# EAGLE board MCDB (EAGLE 9.4.2)
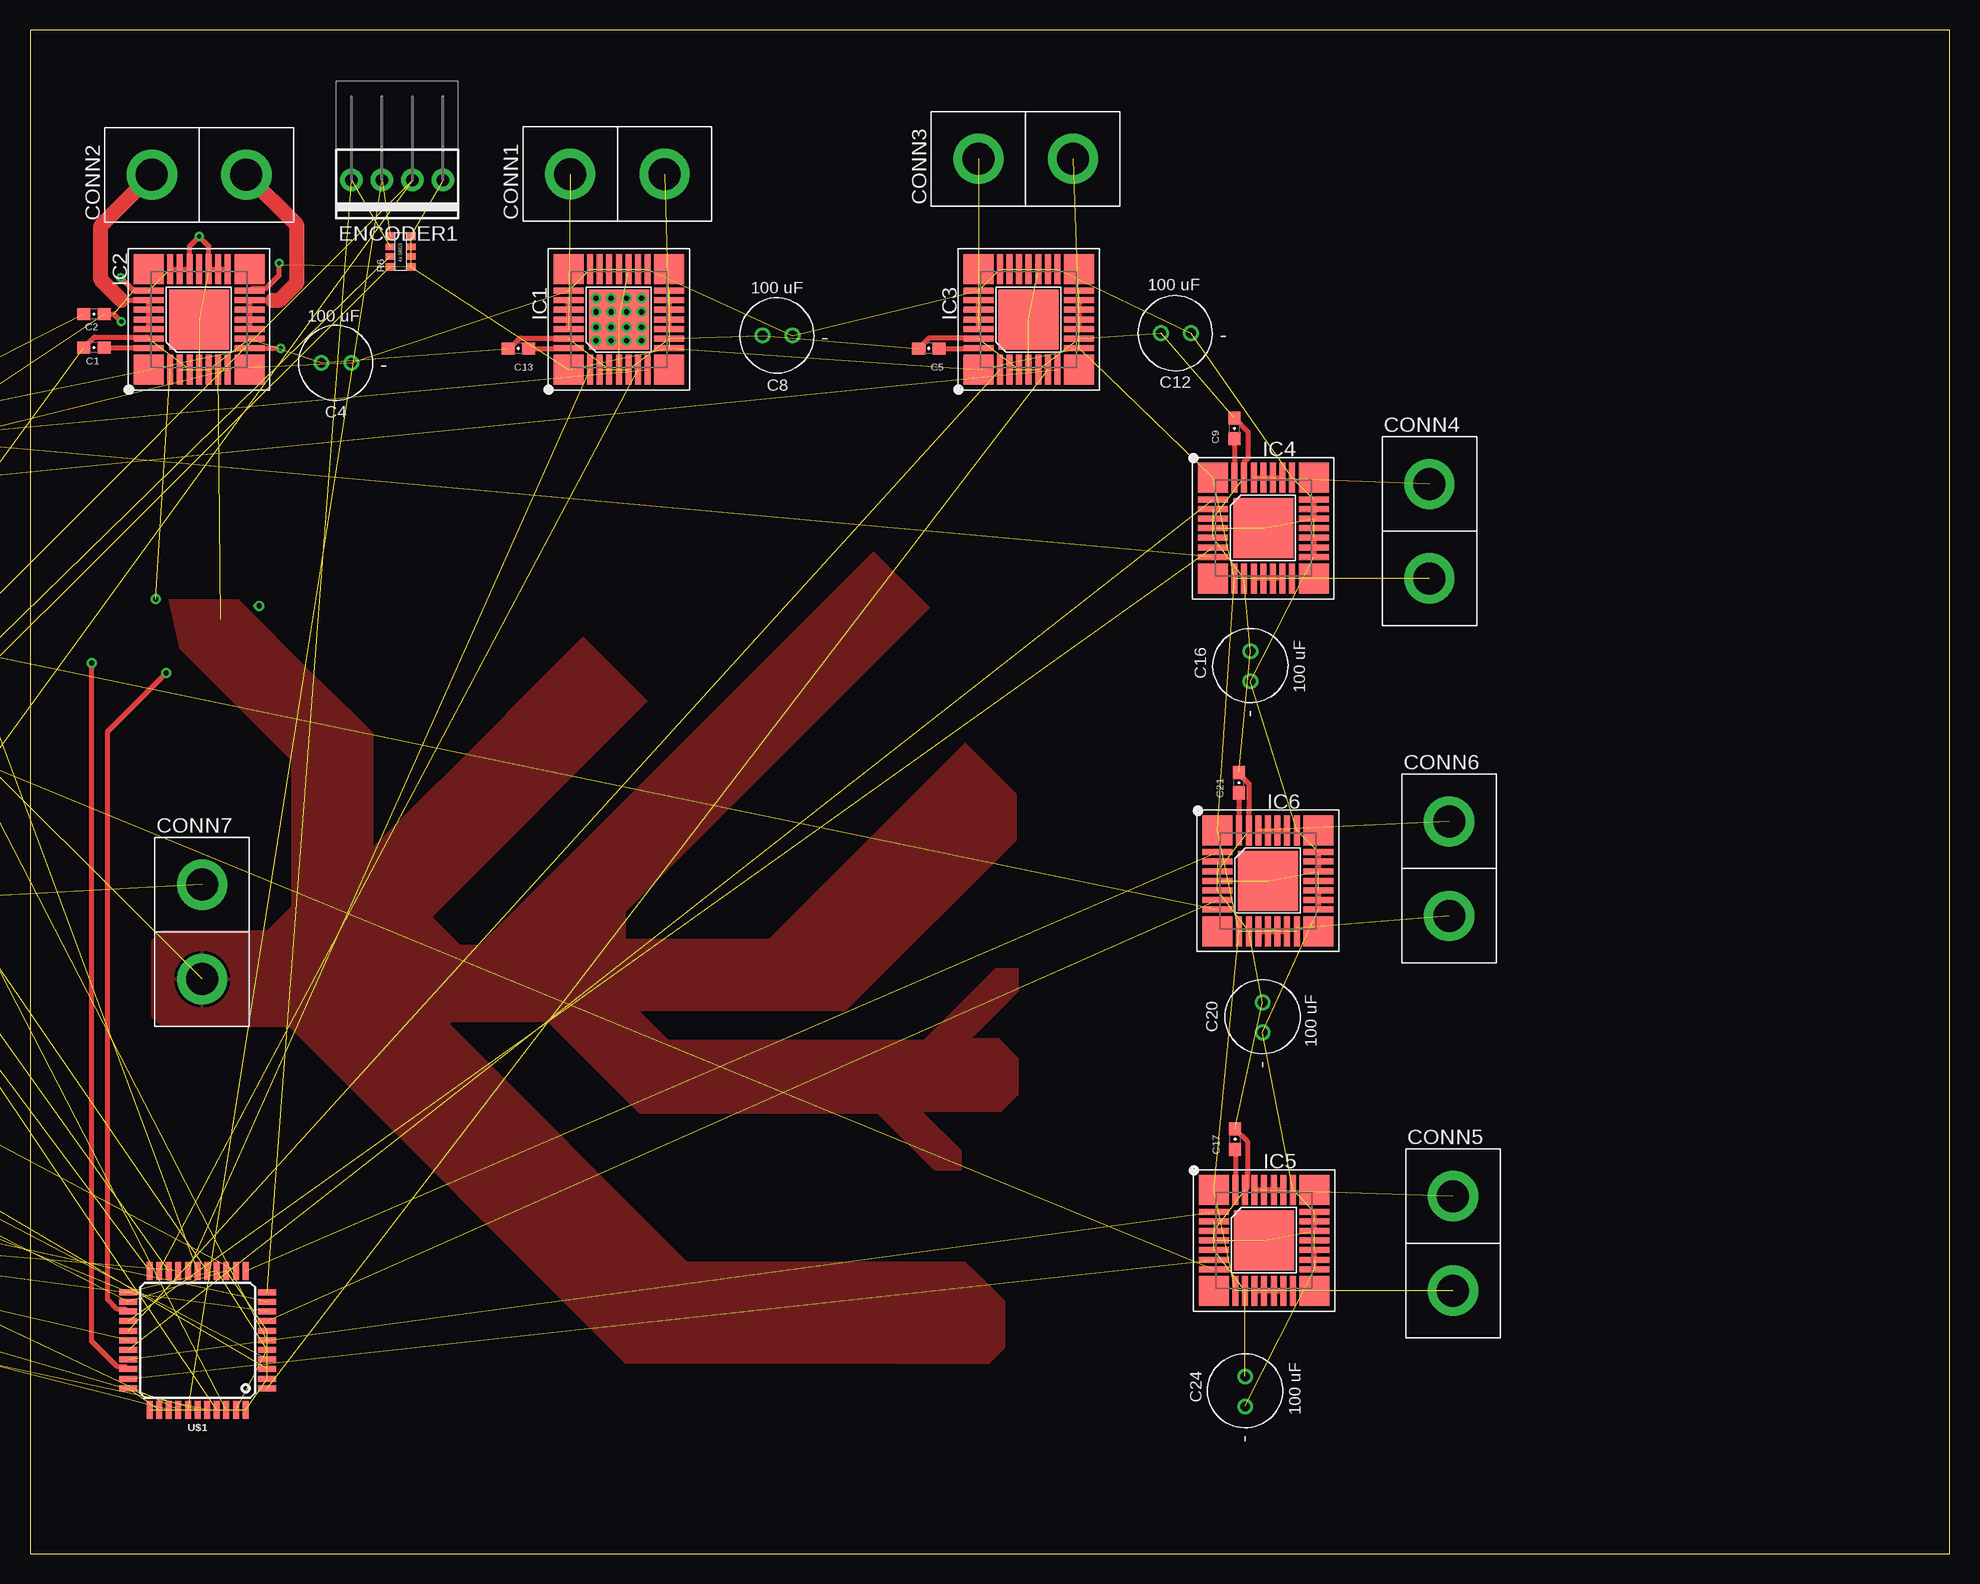
[diagram p0: board, top side]
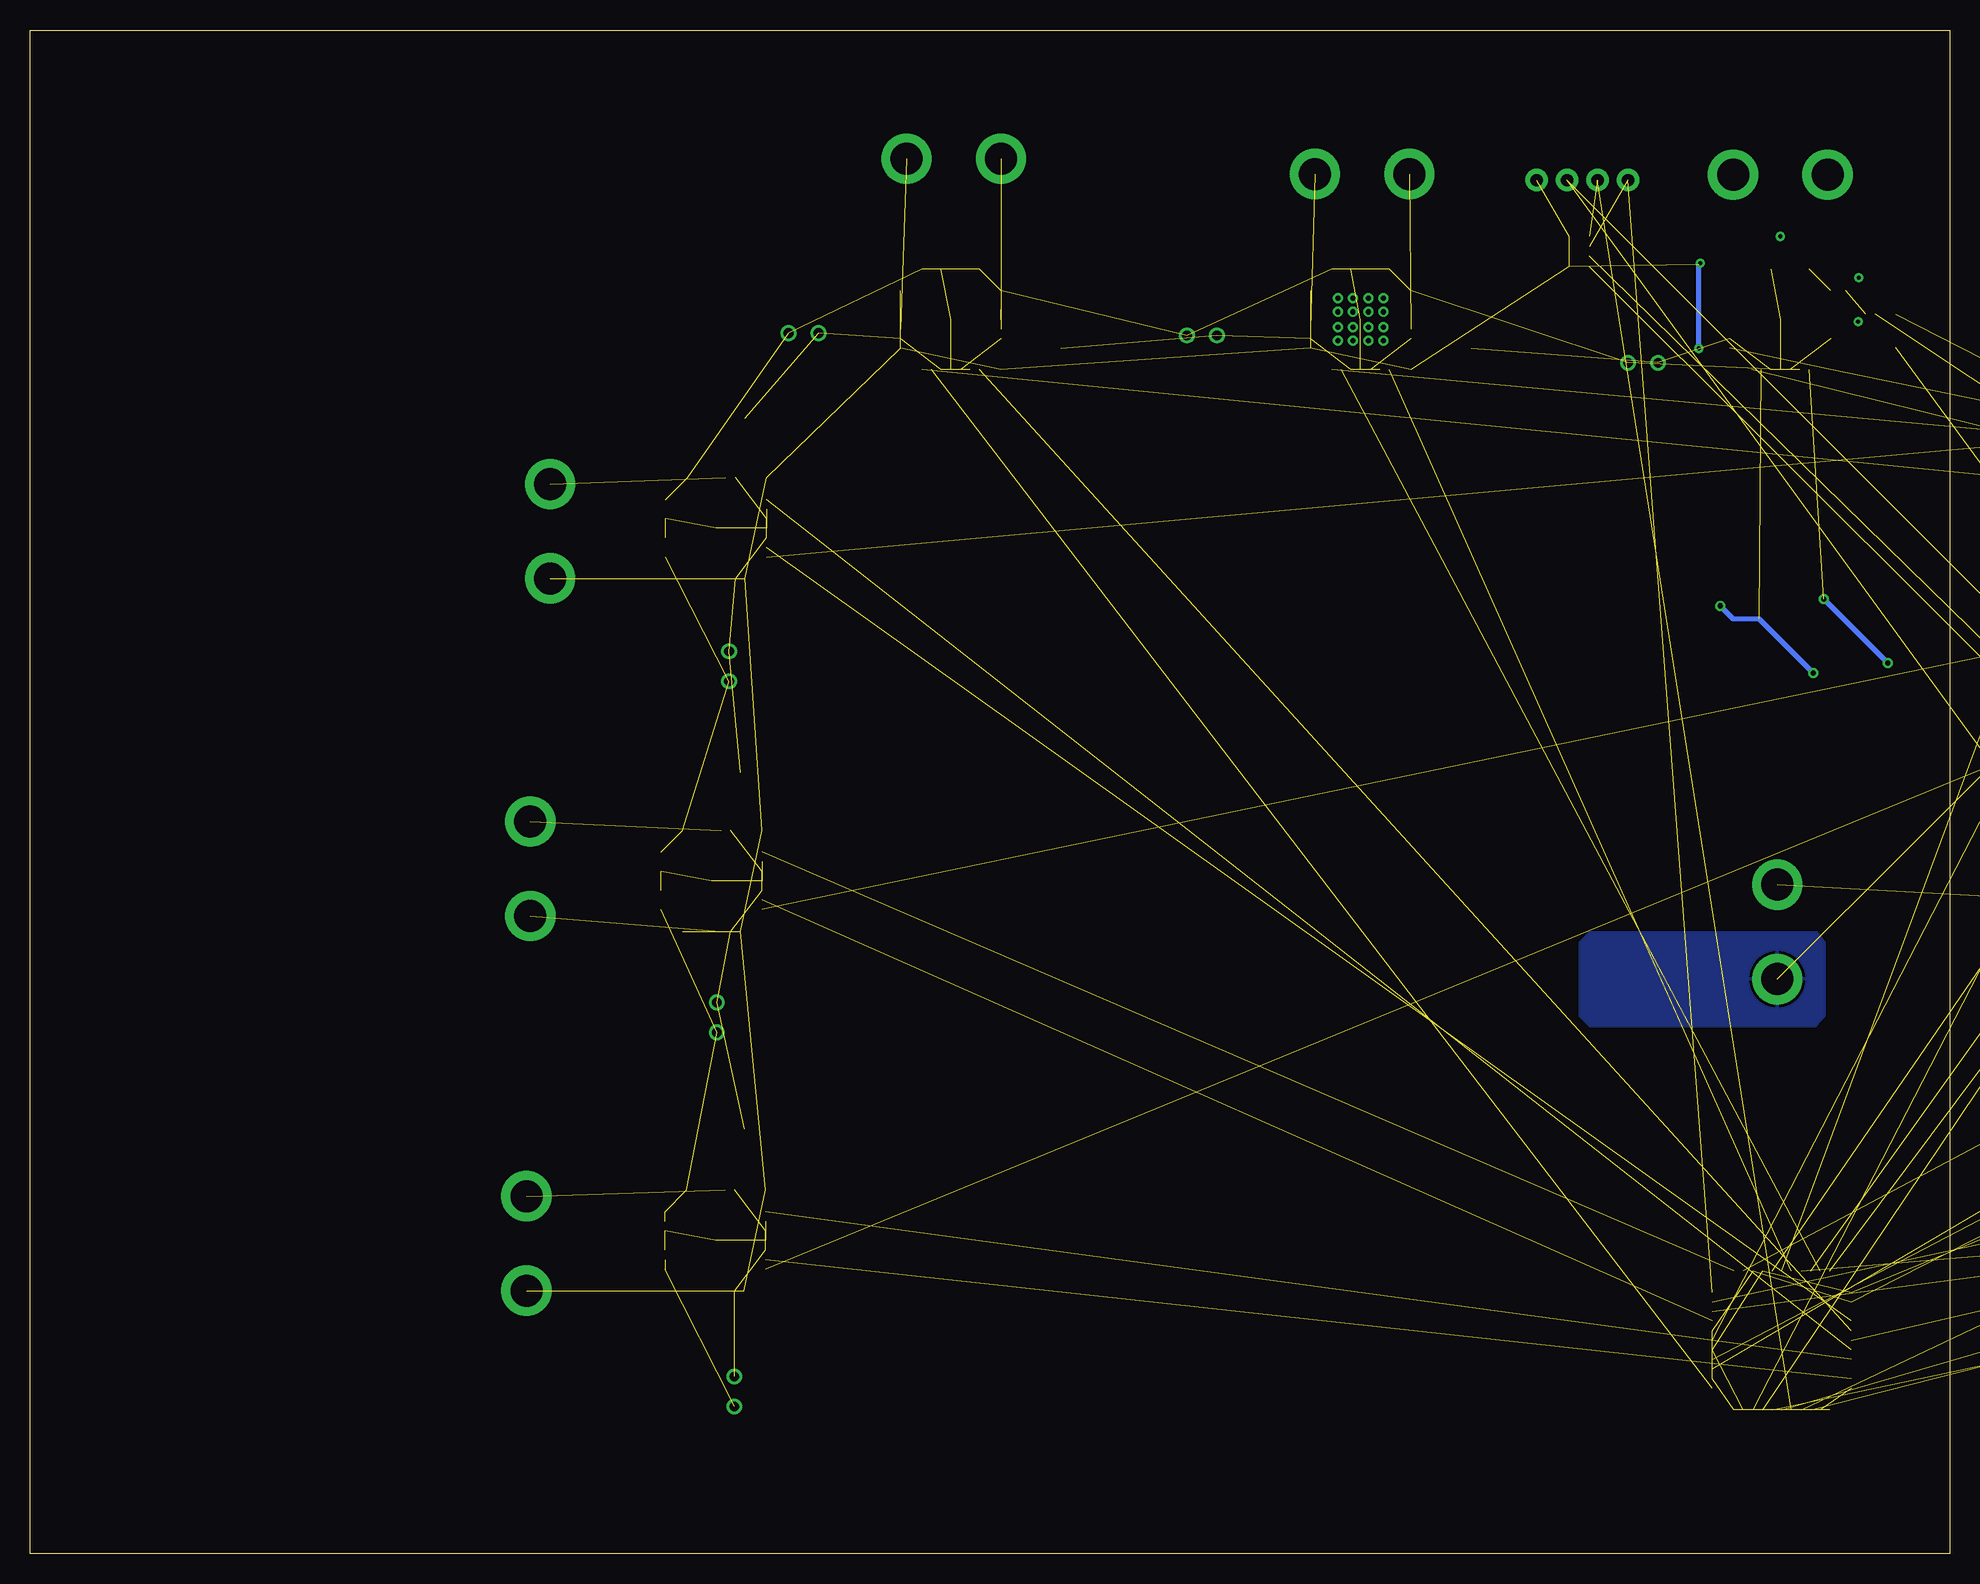
[diagram p1: board, bottom side, seen from below]

Size 160 x 127 mm. Coordinates in mm from the lower left corner, seen from the top.
Outline: 0,0 160,0 160,127 0,127 0,0
Copper layers (1*16): Top 0.035mm / dielectric 1.5mm / Bottom 0.035mm
Design rules "default": minimum track width 6mil, minimum drill 0.35mm, track to track 6mil, track to pad 6mil, pad to pad 6mil, via to via 6mil, smd to smd 6mil, copper to edge 40mil, drill to drill 6mil, minimum pad ring 10mil, minimum via ring 8mil, stop-mask expansion 4mil, vias tented up to drill 0mil, thermal gap 10mil

## Footprints (pad centres in the part's own frame; a part is rotated, then mirrored left to right if it is on the bottom)
0603-CAP = smd 1.1 x 1: 1 -0.85,0; 2 0.85,0
.248"CAP_THRU = drill 0.8: MINUS 0,0; PLUS 2.5,0
ANDERSON_VERTICAL = drill 2.667 pad 4.191: PIN1 0,-3.937; PIN2 0,3.937
1X04-MTA = drill 1.016 pad 1.88: 1 -3.81,0; 2 -1.27,0; 3 1.27,0; 4 3.81,0
PQFN-32 = smd 2.5 x 2.5: 1 -4.2,4.2; 9 -4.2,-4.2; 17 4.2,-4.2; 25 4.2,4.2 | smd 2.5 x 0.5: 2 -4.2,2.4; 3 -4.2,1.6; 4 -4.2,0.8; 5 -4.2,0; 6 -4.2,-0.8; 7 -4.2,-1.6; 8 -4.2,-2.4; 18 4.2,-2.4; 19 4.2,-1.6; 20 4.2,-0.8; 21 4.2,0; 22 4.2,0.8; 23 4.2,1.6; 24 4.2,2.4 | smd 0.5 x 2.5: 10 -2.4,-4.2; 11 -1.6,-4.2; 12 -0.8,-4.2; 13 0,-4.2; 14 0.8,-4.2; 15 1.6,-4.2; 16 2.4,-4.2; 26 2.4,4.2; 27 1.6,4.2; 28 0.8,4.2; 29 0,4.2; 30 -0.8,4.2; 31 -1.6,4.2; 32 -2.4,4.2 | smd 5 x 5: MID 0,0
USB-B-PTH = drill 0.914 pad 1.676: D+ 4,1.25; D- 5.981,1.25; GND 4,-1.25; VBUS 5.981,-1.25 | drill 2.286: SHLD1 1.282,-6.02; SHLD2 1.282,6.02
LED-1206 = smd 1.2 x 1.4: A -1.5,0; C 1.5,0
4X-0603 = smd 0.65 x 0.8: 1 0,-0.05; 4 2.55,-0.05; 5 2.55,1.65; 8 0,1.65 | smd 0.55 x 0.8: 2 0.875,-0.05; 3 1.675,-0.05; 6 1.675,1.65; 7 0.875,1.65
R0603 = smd 1 x 1.1: 1 -0.85,0; 2 0.85,0
TQFP44 = smd 1.5 x 0.5: 1 -5.8,4; 2 -5.8,3.2; 3 -5.8,2.4; 4 -5.8,1.6; 5 -5.8,0.8; 6 -5.8,0; 7 -5.8,-0.8; 8 -5.8,-1.6; 9 -5.8,-2.4; 10 -5.8,-3.2; 11 -5.8,-4; 23 5.8,-4; 24 5.8,-3.2; 25 5.8,-2.4; 26 5.8,-1.6; 27 5.8,-0.8; 28 5.8,0; 29 5.8,0.8; 30 5.8,1.6; 31 5.8,2.4; 32 5.8,3.2; 33 5.8,4 | smd 0.5 x 1.5: 12 -4,-5.8; 13 -3.2,-5.8; 14 -2.4,-5.8; 15 -1.6,-5.8; 16 -0.8,-5.8; 17 0,-5.8; 18 0.8,-5.8; 19 1.6,-5.8; 20 2.4,-5.8; 21 3.2,-5.8; 22 4,-5.8; 34 4,5.8; 35 3.2,5.8; 36 2.4,5.8; 37 1.6,5.8; 38 0.8,5.8; 39 0,5.8; 40 -0.8,5.8; 41 -1.6,5.8; 42 -2.4,5.8; 43 -3.2,5.8; 44 -4,5.8
USB-MICRO-AB-VERT = drill 0.5 pad 0.7: P$1 -1.3,0.5; P$2 -0.65,-0.5; P$3 0,0.5; P$4 0.65,-0.5; P$5 1.3,0.5 | drill 1.175: P$6 -3.575,0.28; P$7 3.575,0.28
CRYSTAL-SMD-7.6X4.1-2PIN = smd 5.5 x 1.5: P$1 0,0; P$2 7.8,0

## Placement (x,y rotation side)
C1  33 nF  [0603-CAP]  5.33,100.52 180 top
C2  100 nF  [0603-CAP]  5.33,103.31 180 top
C3  1 uF  [0603-CAP]  -34.29,86.36 0 top  (outside the outline)
C4  100 uF  [.248"CAP_THRU]  26.8,99.25 180 top
C5  33 nF  [0603-CAP]  74.93,100.46 180 top
C6  100 nF  [0603-CAP]  -11.43,80.01 0 top  (outside the outline)
C7  1 uF  [0603-CAP]  -39.37,86.36 0 top  (outside the outline)
C8  100 uF  [.248"CAP_THRU]  63.56,101.54 180 top
C9  33 nF  [0603-CAP]  100.39,93.79 90 top
C10  100 nF  [0603-CAP]  -19.05,80.01 0 top  (outside the outline)
C11  1 uF  [0603-CAP]  -44.45,86.36 0 top  (outside the outline)
C12  100 uF  [.248"CAP_THRU]  96.77,101.73 180 top
C13  33 nF  [0603-CAP]  40.7,100.46 180 top
C14  100 nF  [0603-CAP]  -26.67,80.01 0 top  (outside the outline)
C15  1 uF  [0603-CAP]  -49.53,86.36 0 top  (outside the outline)
C16  100 uF  [.248"CAP_THRU]  101.73,72.71 90 top
C17  33 nF  [0603-CAP]  100.46,34.54 90 top
C18  100 nF  [0603-CAP]  -34.29,80.01 0 top  (outside the outline)
C19  1 uF  [0603-CAP]  -54.61,86.36 0 top  (outside the outline)
C20  100 uF  [.248"CAP_THRU]  102.74,43.43 90 top
C21  33 nF  [0603-CAP]  100.77,64.26 90 top
C22  100 nF  [0603-CAP]  -41.91,80.01 0 top  (outside the outline)
C23  1 uF  [0603-CAP]  -59.69,86.36 0 top  (outside the outline)
C24  100 uF  [.248"CAP_THRU]  101.28,12.26 90 top
C25  22 pF  [0603-CAP]  -10.16,86.36 0 top  (outside the outline)
C26  22pF  [0603-CAP]  -29.21,86.36 0 top  (outside the outline)
C27  .1 uF  [0603-CAP]  -22.86,86.36 0 top  (outside the outline)
C28  1 uF  [0603-CAP]  -64.77,86.36 0 top  (outside the outline)
C29  [0603-CAP]  -49.53,91.44 0 top  (outside the outline)
C30  [0603-CAP]  -54.61,91.44 0 top  (outside the outline)
C31  [0603-CAP]  -59.69,91.44 0 top  (outside the outline)
C32  [0603-CAP]  -64.77,91.44 0 top  (outside the outline)
C33  [0603-CAP]  -69.85,91.44 0 top  (outside the outline)
C34  [0603-CAP]  -74.93,91.44 0 top  (outside the outline)
C35  [0603-CAP]  -80.01,91.44 0 top  (outside the outline)
C36  [0603-CAP]  -85.09,91.44 0 top  (outside the outline)
C37  [.248"CAP_THRU]  -11.43,71.12 0 top  (outside the outline)
C38  [.248"CAP_THRU]  -20.32,71.12 0 top  (outside the outline)
C39  [.248"CAP_THRU]  -29.21,71.12 0 top  (outside the outline)
CONN1  ANDERSONVERTICAL  [ANDERSON_VERTICAL]  48.96,115 90 top
CONN2  ANDERSONVERTICAL  [ANDERSON_VERTICAL]  14.1,114.94 90 top
CONN3  ANDERSONVERTICAL  [ANDERSON_VERTICAL]  82.99,116.27 90 top
CONN4  ANDERSONVERTICAL  [ANDERSON_VERTICAL]  116.65,85.22 0 top
CONN5  ANDERSONVERTICAL  [ANDERSON_VERTICAL]  118.62,25.84 0 top
CONN6  ANDERSONVERTICAL  [ANDERSON_VERTICAL]  118.3,57.09 0 top
CONN7  ANDERSONVERTICAL  [ANDERSON_VERTICAL]  14.35,51.82 0 top
ENCODER  [1X04-MTA]  -27.94,30.48 0 top  (outside the outline)
ENCODER1  [1X04-MTA]  30.61,114.49 180 top
ENCODER2  [1X04-MTA]  -50.8,30.48 0 top  (outside the outline)
ENCODER3  [1X04-MTA]  -62.23,30.48 0 top  (outside the outline)
ENCODER4  [1X04-MTA]  -73.66,30.48 0 top  (outside the outline)
ENCODER5  [1X04-MTA]  -14.1,54.17 0 top  (outside the outline)
IC1  MC33926  [PQFN-32]  49.09,102.87 90 top
IC2  MC33926  [PQFN-32]  14.1,102.87 90 top
IC3  MC33926  [PQFN-32]  83.25,102.87 90 top
IC4  MC33926  [PQFN-32]  102.81,85.47 0 top
IC5  MC33926  [PQFN-32]  102.87,26.1 0 top
IC6  MC33926  [PQFN-32]  103.19,56.07 0 top
J1  USB_B_PTH  [USB-B-PTH]  -13.97,30.48 0 top  (outside the outline)
LED1  GREEN  [LED-1206]  -45.72,72.39 0 top  (outside the outline)
LED4  RED  [LED-1206]  -60.96,72.39 0 top  (outside the outline)
LED5  YELLOW  [LED-1206]  -38.1,72.39 0 top  (outside the outline)
LED6  GREEN  [LED-1206]  -53.34,72.39 0 top  (outside the outline)
R1  10k  [4X-0603]  -30.48,91.44 0 top  (outside the outline)
R3  200  [R0603]  -80.01,86.36 0 top  (outside the outline)
R4  >VALUE  [R0603]  -71.12,71.12 0 top  (outside the outline)
R5  200  [R0603]  -85.09,86.36 0 top  (outside the outline)
R6  10k  [4X-0603]  31.69,107.25 90 top
R7  200  [R0603]  -8.89,92.71 0 top  (outside the outline)
R8  330  [4X-0603]  -40.64,91.44 0 top  (outside the outline)
R9  200  [R0603]  -13.97,92.71 0 top  (outside the outline)
R11  200  [R0603]  -69.85,86.36 0 top  (outside the outline)
R12  10k  [4X-0603]  -45.72,91.44 0 top  (outside the outline)
R13  200  [R0603]  -74.93,86.36 0 top  (outside the outline)
U$1  32U4  [TQFP44]  13.97,17.78 180 top
UCAP  1 uF  [0603-CAP]  -16.51,86.36 0 top  (outside the outline)
USB1  USB-OTGMICRO-AB-VERT  [USB-MICRO-AB-VERT]  -21.59,91.44 0 top  (outside the outline)
Y1  16MHz  [CRYSTAL-SMD-7.6X4.1-2PIN]  -83.82,57.15 0 top  (outside the outline)

## Library data of the parts
C1-C3 C5-C7 C9-C11 C13-C15 C17-C19 C21-C23 C25-C36 UCAP = pie; PIE-INT-REF-NUM: CAPACITOR-GENERIC
C4 C8 C12 C16 C20 C24 C37-C39 IC1-IC6 R1 R6 R8 R12 Y1 = pie
CONN1-CONN7 = pie; PIE-INT-REF-NUM: Anderson
ENCODER ENCODER1-ENCODER5 = pie; PIE-INT-REF-NUM: MTA
J1 = SparkFun-Connectors; PROD_ID: CONN-08278; SF_ID: PRT-00139
LED1 LED4-LED6 = pie; PIE-INT-REF-NUM: LED
R3-R5 R7 R9 R11 R13 = pie; DESCRIPTION: RESISTOR, American symbol; DISTRIBUTOR: DigiKey; MANUFACTURER: Rohm Semiconductor; NOTES: Cut Tape; PACKAGE: R0603
U$1 = pie; PROD_ID: IC-11161
USB1 = pie; PIE-DIGIKEY-PN: 732-5959-1-ND

## Nets
A1: ENCODER3.3 R1.5 U$1.36
A2: ENCODER.3 R1.7 U$1.37
A3: ENCODER1.3 R6.5 U$1.38
A4: ENCODER2.3 R6.7 U$1.39
A5: ENCODER4.3 R12.5 U$1.40
A6: ENCODER5.3 R12.7 U$1.41
B1: ENCODER3.4 R1.6 U$1.9
B2: ENCODER.4 R1.8 U$1.10
B3: ENCODER1.4 R6.6 U$1.11
B4: ENCODER2.4 R6.8 U$1.28
B5: ENCODER4.4 R12.6 U$1.19
B6: ENCODER5.4 R12.8 U$1.20
CCP: C13.1 IC1.32
CCP2: C1.1 IC2.32
CCP3: C5.1 IC3.32
CCP4: C9.1 IC4.32
CCP5: C17.1 IC5.32
CCP6: C21.1 IC6.32
D+: C29.2 J1.D+ U$1.4 USB1.P$3
D-: C30.2 J1.D- U$1.3 USB1.P$2
FB1: C15.2 IC1.8 R9.2
FB2: C3.2 IC2.8 R3.2
FB3: C7.2 IC3.8 R5.2
FB4: C11.2 IC4.8 R7.2
FB5: C19.2 IC5.8 R11.2
FB6: C23.2 IC6.8 R13.2
GND: C2.1 C3.1 C4.MINUS C6.1 C7.1 C8.MINUS C10.1 C11.1 C12.MINUS C14.1 C15.1 C16.MINUS C18.1 C19.1 C20.MINUS C22.1 C23.1 C24.MINUS C25.1 C26.1 C27.1 C28.1 C29.1 C30.1 C31.1 C32.1 C33.1 C34.1 C35.1 C36.1 C37.MINUS C38.MINUS C39.MINUS CONN7.PIN2 ENCODER1.2 ENCODER2.2 ENCODER3.2 ENCODER4.2 ENCODER5.2 ENCODER.2 IC1.3 IC1.5 IC1.18 IC1.19 IC1.20 IC1.22 IC1.23 IC1.24 IC1.26 IC1.MID IC2.3 IC2.5 IC2.18 IC2.19 IC2.20 IC2.22 IC2.23 IC2.24 IC2.26 IC2.MID IC3.3 IC3.5 IC3.18 IC3.19 IC3.20 IC3.22 IC3.23 IC3.24 IC3.26 IC3.MID IC4.3 IC4.5 IC4.18 IC4.19 IC4.20 IC4.22 IC4.23 IC4.24 IC4.26 IC4.MID IC5.3 IC5.5 IC5.18 IC5.19 IC5.20 IC5.22 IC5.23 IC5.24 IC5.26 IC5.MID IC6.3 IC6.5 IC6.18 IC6.19 IC6.20 IC6.22 IC6.23 IC6.24 IC6.26 IC6.MID J1.GND R3.1 R5.1 R7.1 R8.2 R8.3 R8.4 R9.1 R11.1 R13.1 U$1.5 U$1.15 U$1.23 U$1.33 U$1.35 U$1.43 UCAP.1 USB1.P$5 USB1.P$6 USB1.P$7
INV1: IC1.7 U$1.21
INV2: IC2.7 U$1.25
INV3: IC3.7 U$1.1
INV4: IC4.7 U$1.26
INV5: IC5.7 U$1.32
INV6: IC6.7 U$1.8
LED1: LED4.A
LED2: LED5.A
LED3: LED6.A
N$4: LED4.C R8.5
N$5: LED6.C R8.7
N$7: LED5.C R8.6
N$11: IC1.21
N$12: LED1.C R8.8
N$16: U$1.6 UCAP.2
N$17: C25.2 U$1.17 Y1.P$2
N$18: C26.2 U$1.16 Y1.P$1
N$19: C27.2 U$1.42
N$21: R4.1 U$1.13
OUT1: CONN1.PIN1 IC1.12 IC1.13 IC1.14 IC1.15
OUT2: CONN1.PIN2 IC1.27 IC1.28 IC1.29 IC1.30
OUT3: CONN2.PIN1 IC2.12 IC2.13 IC2.14 IC2.15
OUT4: CONN2.PIN2 IC2.27 IC2.28 IC2.29 IC2.30
OUT5: CONN3.PIN1 IC3.12 IC3.13 IC3.14 IC3.15
OUT6: CONN3.PIN2 IC3.27 IC3.28 IC3.29 IC3.30
OUT7: CONN4.PIN1 IC4.12 IC4.13 IC4.14 IC4.15
OUT8: CONN4.PIN2 IC4.27 IC4.28 IC4.29 IC4.30
OUT9: CONN5.PIN1 IC5.12 IC5.13 IC5.14 IC5.15
OUT10: CONN5.PIN2 IC5.27 IC5.28 IC5.29 IC5.30
OUT11: CONN6.PIN1 IC6.12 IC6.13 IC6.14 IC6.15
OUT12: CONN6.PIN2 IC6.27 IC6.28 IC6.29 IC6.30
PD5: R8.1 U$1.22
PWM1: IC1.2 U$1.18
PWM2: IC2.2 U$1.31
PWM3: IC3.2 U$1.27
PWM4: IC4.2 U$1.29
PWM5: IC5.2 U$1.30
PWM6: IC6.2 U$1.12
VCC: C28.2 C31.2 C32.2 C33.2 C34.2 C35.2 C36.2 ENCODER1.1 ENCODER2.1 ENCODER3.1 ENCODER4.1 ENCODER5.1 ENCODER.1 IC1.1 IC1.10 IC1.16 IC2.1 IC2.10 IC2.16 IC3.1 IC3.10 IC3.16 IC4.1 IC4.10 IC4.16 IC5.1 IC5.10 IC5.16 IC6.1 IC6.10 IC6.16 J1.VBUS LED1.A R1.1 R1.2 R1.3 R1.4 R4.2 R6.1 R6.2 R6.3 R6.4 R12.1 R12.2 R12.3 R12.4 U$1.2 U$1.7 U$1.14 U$1.24 U$1.34 U$1.44 USB1.P$1
VPWR: C1.2 C2.2 C4.PLUS C5.2 C6.2 C8.PLUS C9.2 C10.2 C12.PLUS C13.2 C14.2 C16.PLUS C17.2 C18.2 C20.PLUS C21.2 C22.2 C24.PLUS C37.PLUS C38.PLUS C39.PLUS CONN7.PIN1 IC1.4 IC1.6 IC1.11 IC1.31 IC2.4 IC2.6 IC2.11 IC2.31 IC3.4 IC3.6 IC3.11 IC3.31 IC4.4 IC4.6 IC4.11 IC4.31 IC5.4 IC5.6 IC5.11 IC5.31 IC6.4 IC6.6 IC6.11 IC6.31

## Tracks (layer width: path | path; a pad name or v marks a point on that pad's centre or on a via)
A1  (2 unrouted)
A2  (2 unrouted)
A3  (2 unrouted)
A4  (2 unrouted)
A5  (2 unrouted)
A6  (2 unrouted)
B1  (2 unrouted)
B2  (2 unrouted)
B3  (2 unrouted)
B4  (2 unrouted)
B5  (2 unrouted)
B6  (2 unrouted)
CCP
  Top 0.406: C13.1 44.87,100.46 IC1.32
CCP2
  Top 0.406: C1.1 9.85,100.52 IC2.32
CCP3
  Top 0.406: C5.1 79.03,100.46 IC3.32
CCP4
  Top 0.406: C9.1 100.41,92.93 IC4.32
CCP5
  Top 0.406: C17.1 IC5.32
CCP6
  Top 0.406: C21.1 100.78,60.28 IC6.32
D+  (3 unrouted)
D-  (3 unrouted)
FB1  (2 unrouted)
FB2  (2 unrouted)
FB3  (2 unrouted)
FB4  (2 unrouted)
FB5  (2 unrouted)
FB6  (2 unrouted)
GND  (via drill 0.35)  (104 unrouted)
  Top 0.406: IC4.24 IC4.23 IC4.22 | IC4.20 IC4.19 IC4.18 | IC6.24 IC6.23 IC6.22 | IC6.20 IC6.19 IC6.18 | IC5.18 IC5.20 | IC5.22 IC5.24 | IC2.24 IC2.23 IC2.22 13.3,108.99 v14.1,109.79 14.9,108.99 IC2.20 IC2.19 IC2.18 | IC2.26 8.65,105.27 v7.56,106.36 | C2.1 6.99,103.31 v7.62,102.68
INV1  (1 unrouted)
INV2  (via drill 0.43)  (1 unrouted)
  Top 0.406: U$1.25 7.98,20.37 7.27,20.37 6.48,21.17 6.48,68.52 v11.37,73.41 | v19.11,78.99 18.8,78.99
  Bottom 0.406: v11.37,73.41 15.88,77.92 18.03,77.92 v19.11,78.99 19.18,79.06
INV3  (1 unrouted)
INV4  (1 unrouted)
INV5  (1 unrouted)
INV6  (1 unrouted)
N$4  (1 unrouted)
N$5  (1 unrouted)
N$7  (1 unrouted)
N$12  (1 unrouted)
N$13  (via drill 0.43)
  other vias: 47.18,104.65
N$16  (1 unrouted)
N$17  (2 unrouted)
N$18  (2 unrouted)
N$19  (1 unrouted)
N$21  (1 unrouted)
N$22  (via drill 0.43)
  other vias: 48.45,104.65
N$23  (via drill 0.43)
  other vias: 49.72,104.65
N$24  (via drill 0.43)
  other vias: 50.99,104.65
N$25  (via drill 0.43)
  other vias: 47.18,103.5
N$26  (via drill 0.43)
  other vias: 48.45,103.5
N$27  (via drill 0.43)
  other vias: 49.72,103.5
N$28  (via drill 0.43)
  other vias: 50.99,103.5
N$29  (via drill 0.43)
  other vias: 47.18,102.23
N$30  (via drill 0.43)
  other vias: 48.45,102.23
N$31  (via drill 0.43)
  other vias: 49.72,102.23
N$32  (via drill 0.43)
  other vias: 50.99,102.23
N$33  (via drill 0.43)
  other vias: 47.18,101.09
N$34  (via drill 0.43)
  other vias: 48.45,101.09
N$35  (via drill 0.43)
  other vias: 49.72,101.09
N$36  (via drill 0.43)
  other vias: 50.99,101.09
OUT1  (1 unrouted)
  Top 0.406: IC1.15 IC1.14 IC1.13 IC1.12
OUT2  (1 unrouted)
  Top 0.406: IC1.30 IC1.29 IC1.28 IC1.27
OUT3
  Top 0.406: IC2.12 IC2.13 IC2.14 IC2.15 18.31,104.46 20.19,104.46
  Top 1.27: CONN2.PIN1 22.26,110.71 22.26,105.95 20.77,104.46 20.19,104.46
OUT4
  Top 0.406: IC2.30 IC2.29 IC2.28 IC2.27 9.88,104.46 7.62,104.46 7.61,104.47
  Top 1.27: 7.61,104.47 5.91,106.17 5.91,110.68 CONN2.PIN2
OUT5  (1 unrouted)
  Top 0.406: IC3.15 IC3.14 IC3.13 IC3.12
OUT6  (3 unrouted)
  Top 0.406: IC3.30 IC3.27
OUT7  (1 unrouted)
  Top 0.406: IC4.15 IC4.14 IC4.13 IC4.12
OUT8  (1 unrouted)
  Top 0.406: IC4.30 IC4.29 IC4.28 IC4.27
OUT9  (1 unrouted)
  Top 0.406: IC5.12 IC5.13 IC5.14 IC5.15
OUT10  (1 unrouted)
  Top 0.406: IC5.27 IC5.28 IC5.29 IC5.30
OUT11  (1 unrouted)
  Top 0.406: IC6.12 IC6.13 IC6.14 IC6.15
OUT12  (1 unrouted)
  Top 0.406: IC6.30 IC6.29 IC6.28 IC6.27
PD5  (1 unrouted)
PWM1  (1 unrouted)
PWM2  (via drill 0.43)  (1 unrouted)
  Top 0.406: U$1.31 7.98,15.57 7.27,15.57 5.14,17.7 v5.14,74.23
  Bottom 0.406: v5.14,74.23 v10.48,79.57
PWM3  (1 unrouted)
PWM4  (1 unrouted)
PWM5  (1 unrouted)
PWM6  (1 unrouted)
VCC  (via drill 0.35)  (51 unrouted)
  Top 0.406: IC2.16 18.49,105.46 19.69,105.46 20.77,106.54 v20.77,107.57 | IC2.10 20.88,100.47 v20.89,100.46
  Bottom 0.406: v20.89,100.46 20.89,107.45 v20.77,107.57
VPWR  (39 unrouted)
  Top 0.406: C1.2 5.37,101.41 9.76,101.41 IC2.31 | C13.2 40,100.46 40.86,101.31 43.91,101.31 43.94,101.35 44.81,101.35 IC1.31 | 74.23,100.14 C5.2 74.97,101.35 78.97,101.35 IC3.31 | C9.2 101.54,93.5 101.54,91.31 101.21,90.98 IC4.31 | C21.2 100.78,64.97 101.63,64.11 101.63,61.82 101.59,61.78 IC6.31 | C17.2 101.47,34.38 101.47,31.7 101.46,31.7 101.46,30.49 IC5.31
  pour Bottom (rank 2): 10.41,50.93 10.41,44.83 11.18,43.94 29.97,43.94 30.86,44.83 30.86,50.93 29.97,51.82 11.05,51.82
  pour Top: 19.81,51.94 21.84,53.98 21.84,66.1 12.51,75.44 11.62,79.5 17.34,79.5 23.43,73.41 27.05,69.91 28.57,68.39 28.57,58.8 39.75,69.98 39.69,69.98 46.1,76.39 51.44,71.05 33.47,53.08 35.81,50.74 37.57,50.74 70.32,83.49 74.97,78.84 49.59,53.47 49.59,51.31 49.66,51.24 61.66,51.24 77.93,67.52 77.93,67.55 82.17,63.31 82.17,59.44 75.44,52.7 75.43,52.71 75.44,52.71 67.94,45.21 50.86,45.21 50.8,45.15 53.15,42.8 74.55,42.8 80.52,48.77 82.36,48.77 82.36,46.86 78.42,42.93 80.71,42.93 82.36,41.27 82.36,38.29 80.9,36.83 74.36,36.83 77.6,33.59 77.6,31.94 75.44,31.94 70.68,36.7 50.86,36.7 43.24,44.32 35.12,44.32 34.92,44.13 54.74,24.32 77.91,24.32 79.69,22.61 81.22,21.08 81.22,17.14 79.88,15.81 72.45,15.81 68.07,15.88 49.66,15.88 21.65,43.88 11.05,43.88 10.16,44.77 10.16,51.05 11.05,51.94